# EAGLE board 6-axis-copter (EAGLE 7.0.0)
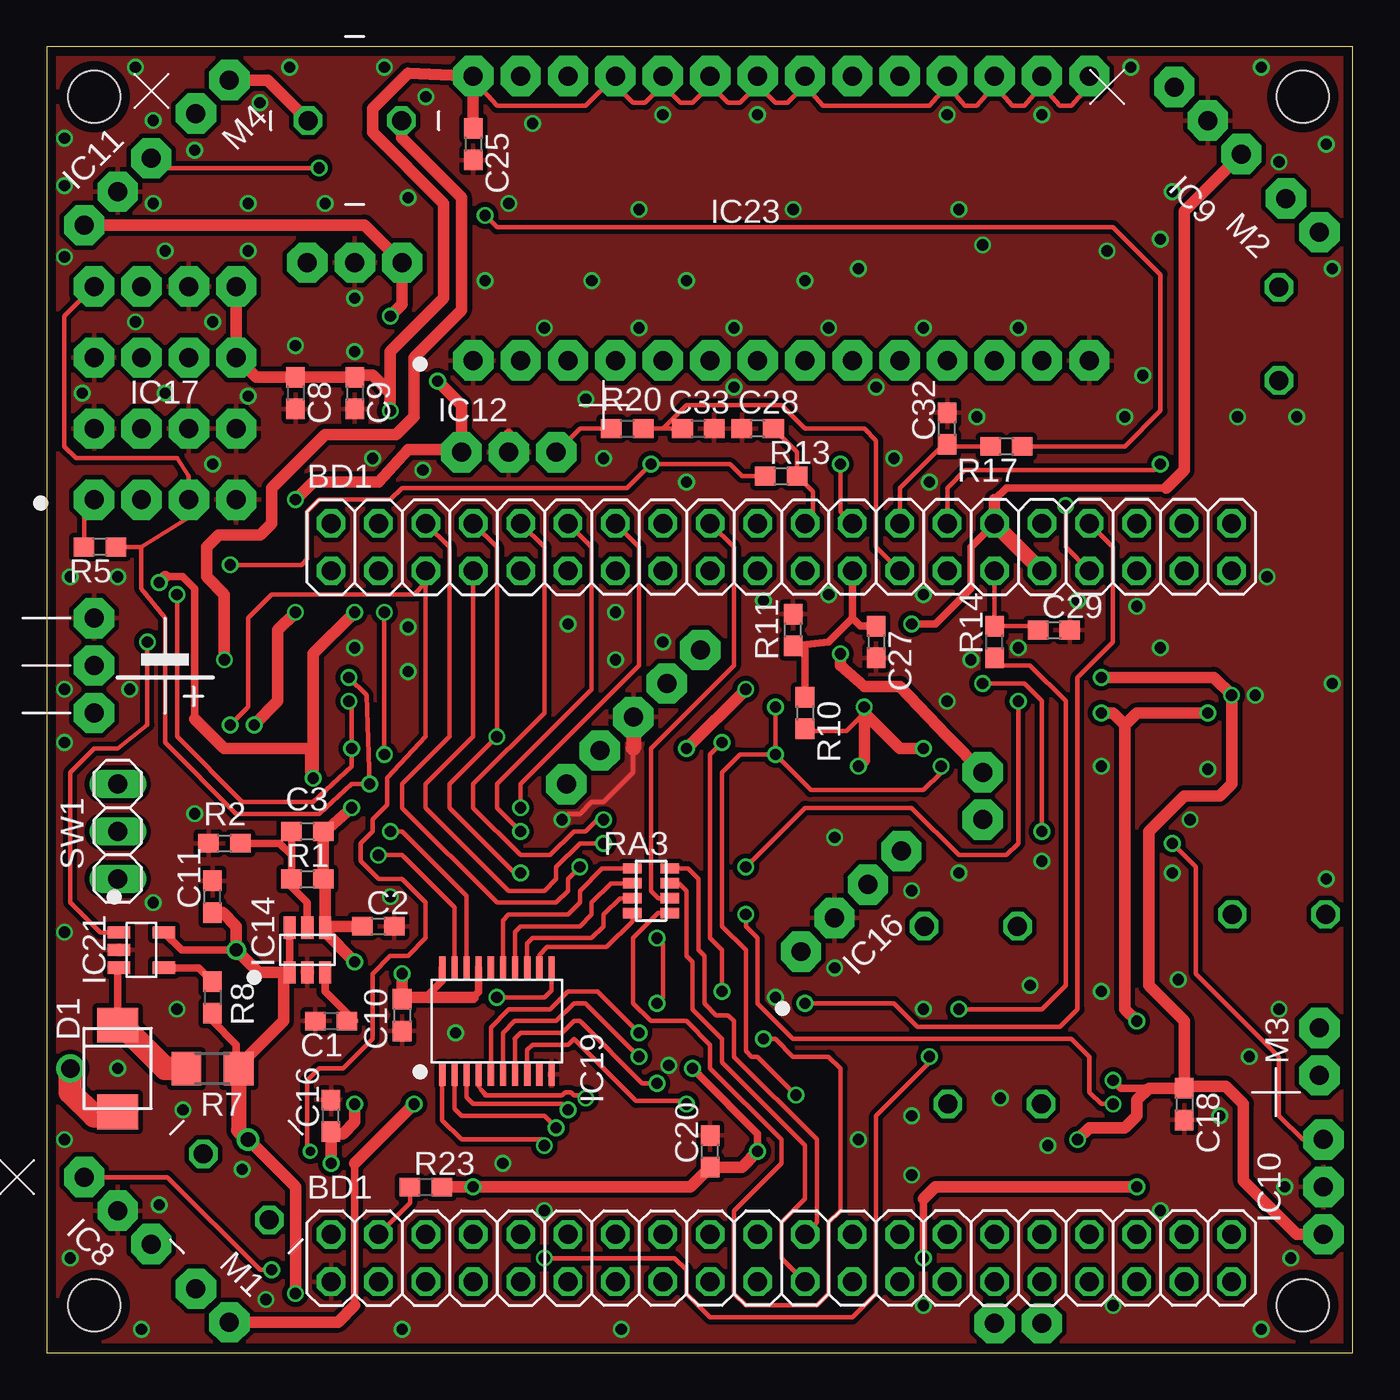
[diagram p0: board, top side]
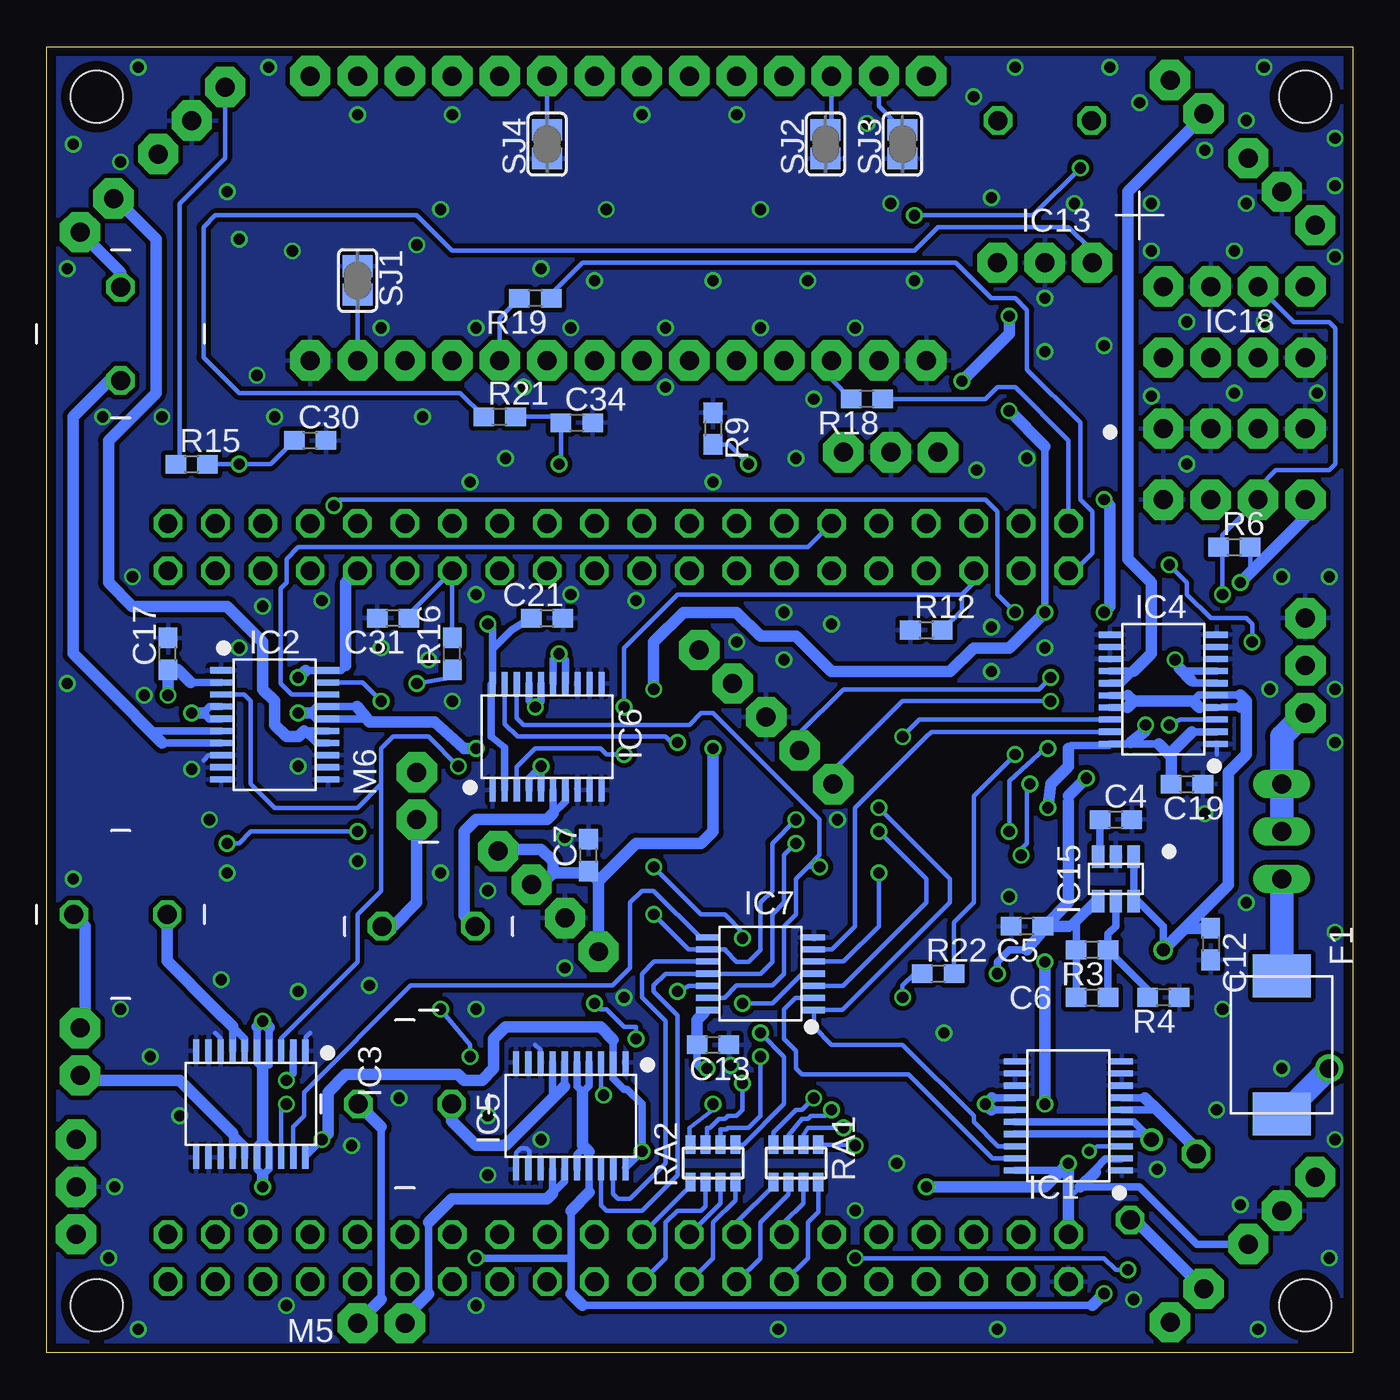
[diagram p1: board, bottom side, seen from below]

Size 70 x 70 mm. Coordinates in mm from the lower left corner, seen from the top.
Outline: 0,0 70,0 70,70 0,70 0,0
Copper layers (1*16): Top 0.035mm / dielectric 1.53mm / Bottom 0.035mm
Design rules "pban_5mil-l2": minimum track width 5mil, minimum drill 0.3mm, track to track 5mil, track to pad 0.229mm, pad to pad 5mil, via to via 5mil, smd to smd 5mil, copper to edge 0.5mm, drill to drill 0.5mm, minimum pad ring 0.15mm, minimum via ring 0.15mm, stop-mask expansion 4mil, vias tented up to drill 0.35mm, thermal gap 10mil
Holes 2.8 mm at 2.54,67.31 2.54,2.54 67.31,2.54 67.31,67.31
bRestrict: 19 lines

## Footprints (pad centres in the part's own frame; a part is rotated, then mirrored left to right if it is on the bottom)
LIPO2CEL = drill 1.016 pad 2.159 octagon: + 2.54,0; +- 0,0; - -2.54,0
H8-PRO-BOARD = drill 1.016 octagon: 1 24.13,20.32; 2 24.13,17.78; 3 21.59,20.32; 4 21.59,17.78; 5 19.05,20.32; 6 19.05,17.78; 7 16.51,20.32; 8 16.51,17.78; 9 13.97,20.32; 10 13.97,17.78; 11 11.43,20.32; 12 11.43,17.78; 13 8.89,20.32; 14 8.89,17.78; 15 6.35,20.32; 16 6.35,17.78; 17 3.81,20.32; 18 3.81,17.78; 19 1.27,20.32; 20 1.27,17.78; 21 -1.27,20.32; 22 -1.27,17.78; 23 -3.81,20.32; 24 -3.81,17.78; 25 -6.35,20.32; 26 -6.35,17.78; 27 -8.89,20.32; 28 -8.89,17.78; 29 -11.43,20.32; 30 -11.43,17.78; 31 -13.97,20.32; 32 -13.97,17.78; 33 -16.51,20.32; 34 -16.51,17.78; 35 -19.05,20.32; 36 -19.05,17.78; 37 -21.59,20.32; 38 -21.59,17.78; 39 -24.13,20.32; 40 -24.13,17.78; 41 -24.13,-20.32; 42 -24.13,-17.78; 43 -21.59,-20.32; 44 -21.59,-17.78; 45 -19.05,-20.32; 46 -19.05,-17.78; 47 -16.51,-20.32; 48 -16.51,-17.78; 49 -13.97,-20.32; 50 -13.97,-17.78; 51 -11.43,-20.32; 52 -11.43,-17.78; 53 -8.89,-20.32; 54 -8.89,-17.78; 55 -6.35,-20.32; 56 -6.35,-17.78; 57 -3.81,-20.32; 58 -3.81,-17.78; 59 -1.27,-20.32; 60 -1.27,-17.78; 61 1.27,-20.32; 62 1.27,-17.78; 63 3.81,-20.32; 64 3.81,-17.78; 65 6.35,-20.32; 66 6.35,-17.78; 67 8.89,-20.32; 68 8.89,-17.78; 69 11.43,-20.32; 70 11.43,-17.78; 71 13.97,-20.32; 72 13.97,-17.78; 73 16.51,-20.32; 74 16.51,-17.78; 75 19.05,-20.32; 76 19.05,-17.78; 77 21.59,-20.32; 78 21.59,-17.78; 79 24.13,-20.32; 80 24.13,-17.78
C1608 = smd 1.1 x 1: 1 -0.85,0; 2 0.85,0
SMBF = smd 1.85 x 2.2: 1 2.325,0; 2 -2.325,0
MF-SM300-2 = smd 2.3 x 3.1: 1 -3.7,0; 2 3.7,0
SSOP20-0.65 = smd 0.33 x 1.2: 1 -2.925,-2.86; 2 -2.275,-2.86; 3 -1.625,-2.86; 4 -0.975,-2.86; 5 -0.325,-2.86; 6 0.325,-2.86; 7 0.975,-2.86; 8 1.625,-2.86; 9 2.275,-2.86; 10 2.925,-2.86; 11 2.925,2.86; 12 2.275,2.86; 13 1.625,2.86; 14 0.975,2.86; 15 0.325,2.86; 16 -0.325,2.86; 17 -0.975,2.86; 18 -1.625,2.86; 19 -2.275,2.86; 20 -2.925,2.86
TSSOP14-0.65 = smd 0.33 x 1.2: 1 -1.95,-2.86; 2 -1.3,-2.86; 3 -0.65,-2.86; 4 0,-2.86; 5 0.65,-2.86; 6 1.3,-2.86; 7 1.95,-2.86; 8 1.95,2.86; 9 1.3,2.86; 10 0.65,2.86; 11 0,2.86; 12 -0.65,2.86; 13 -1.3,2.86; 14 -1.95,2.86
DUMMY-GP2Y0A21YK = drill 1.016 pad 2.159 octagon: 1 2.54,0; 2 0,0; 3 -2.54,0
SOT23-6-0.95 = smd 0.65 x 1.2: 1 -0.95,-1.2; 2 0,-1.2; 3 0.95,-1.2; 4 0.95,1.2; 5 0,1.2; 6 -0.95,1.2
DIP9-2.54 = drill 1.016 pad 2.159 octagon: 1 -2.54,-7.62; 2 0,-7.62; 3 2.54,-7.62; 4 5.08,-7.62; 5 5.08,7.62; 6 2.54,7.62; 7 0,7.62; 8 -2.54,7.62; 9 -5.08,7.62
DIP8-2.54 = drill 1.016 pad 2.159 octagon: 1 -3.81,-3.81; 2 -1.27,-3.81; 3 1.27,-3.81; 4 3.81,-3.81; 5 3.81,3.81; 6 1.27,3.81; 7 -1.27,3.81; 8 -3.81,3.81
TSOT23-5-0.95 = smd 0.65 x 1.2: 1 -0.95,-1.2; 2 0,-1.2; 3 0.95,-1.2; 4 0.95,1.2; 5 -0.95,1.2
DIP28-2.54 = drill 1.016 pad 2.159 octagon: 1 -16.51,-7.62; 2 -13.97,-7.62; 3 -11.43,-7.62; 4 -8.89,-7.62; 5 -6.35,-7.62; 6 -3.81,-7.62; 7 -1.27,-7.62; 8 1.27,-7.62; 9 3.81,-7.62; 10 6.35,-7.62; 11 8.89,-7.62; 12 11.43,-7.62; 13 13.97,-7.62; 14 16.51,-7.62; 15 16.51,7.62; 16 13.97,7.62; 17 11.43,7.62; 18 8.89,7.62; 19 6.35,7.62; 20 3.81,7.62; 21 1.27,7.62; 22 -1.27,7.62; 23 -3.81,7.62; 24 -6.35,7.62; 25 -8.89,7.62; 26 -11.43,7.62; 27 -13.97,7.62; 28 -16.51,7.62
LHL08 = drill 1.016 octagon: 1 -2.5,0; 2 2.5,0
DUMMY-MK07 = drill 1.016 pad 2.159 octagon: + 1.27,0; - -1.27,0
R3216 = smd 1.6 x 1.8: 1 -1.4,0; 2 1.4,0
BCN164AB = smd 0.55 x 1: 1 -1.2,-1; 2 -0.4,-1; 3 0.4,-1; 4 1.2,-1; 5 1.2,1; 6 0.4,1; 7 -0.4,1; 8 -1.2,1
SJ = smd 1.168 x 1.6: 1 -0.762,0; 2 0.762,0
SS12D01G4 = drill 1.016 long: 1 -2.54,0; 2 0,0; 3 2.54,0

## Placement (x,y rotation side)
B1  [LIPO2CEL]  2.54,36.83 270 top
BD1  [H8-PRO-BOARD]  39.37,24.13 0 top
C1  0.01u  [C1608]  15.24,17.78 180 top
C2  1u  [C1608]  17.78,22.86 0 top
C3  100p  [C1608]  13.97,27.94 180 top
C4  0.01u  [C1608]  12.7,28.57 0 bottom
C5  1u  [C1608]  17.46,22.86 180 bottom
C6  100p  [C1608]  13.97,19.05 0 bottom
C7  0.1u  [C1608]  40.96,26.67 90 bottom
C8  0.1u  [C1608]  13.34,51.44 270 top
C9  0.1u  [C1608]  16.51,51.44 270 top
C10  0.1u  [C1608]  19.05,18.1 270 top
C11  1u  [C1608]  8.89,24.45 90 top
C12  1u  [C1608]  7.62,21.91 270 bottom
C13  0.1u  [C1608]  34.29,16.51 0 bottom
C16  0.1u  [C1608]  15.24,12.7 90 top
C17  0.1u  [C1608]  63.5,37.47 90 bottom
C18  0.1u  [C1608]  60.96,13.34 270 top
C19  0.1u  [C1608]  8.89,30.48 0 bottom
C20  0.1u  [C1608]  35.56,10.79 90 top
C21  0.1u  [C1608]  43.18,39.37 0 bottom
C25  0.1u  [C1608]  22.86,64.77 270 top
C27  0.1u  [C1608]  44.45,38.1 270 top
C28  0.1u  [C1608]  38.1,49.53 180 top
C29  0.1u  [C1608]  53.98,38.73 0 top
C30  0.1u  [C1608]  55.88,48.9 0 bottom
C31  0.1u  [C1608]  51.44,39.37 180 bottom
C32  0.1u  [C1608]  48.26,49.53 90 top
C33  0.1u  [C1608]  34.92,49.53 0 top
C34  0.1u  [C1608]  41.59,49.85 0 bottom
D1  [SMBF]  3.81,15.24 90 top
F1  [MF-SM300-2]  3.81,16.51 270 bottom
IC1  [SSOP20-0.65]  15.24,12.7 90 bottom
IC2  [SSOP20-0.65]  57.78,33.66 270 bottom
IC3  [SSOP20-0.65]  59.05,13.34 180 bottom
IC4  [SSOP20-0.65]  10.16,35.56 90 bottom
IC5  [SSOP20-0.65]  41.91,12.7 180 bottom
IC6  [SSOP20-0.65]  43.18,33.02 0 bottom
IC7  [TSSOP14-0.65]  31.75,20.32 90 bottom
IC8  [DUMMY-GP2Y0A21YK]  3.81,7.62 135 top
IC9  [DUMMY-GP2Y0A21YK]  62.23,66.04 135 top
IC10  [DUMMY-GP2Y0A21YK]  68.42,8.89 90 top
IC11  [DUMMY-GP2Y0A21YK]  3.81,62.23 45 top
IC12  [DUMMY-GP2Y0A21YK]  24.77,48.26 0 top
IC13  [DUMMY-GP2Y0A21YK]  16.51,58.42 0 bottom
IC14  [SOT23-6-0.95]  13.97,21.59 0 top
IC15  [SOT23-6-0.95]  12.7,25.4 180 bottom
IC16  [DIP9-2.54]  36.83,28.68 45 top
IC17  [DIP8-2.54]  6.35,49.53 0 top
IC18  [DIP8-2.54]  6.35,53.34 0 bottom
IC19  [SSOP20-0.65]  24.13,17.78 0 top
IC21  [TSOT23-5-0.95]  5.08,21.59 270 top
IC23  [DIP28-2.54]  39.37,60.8 0 top
L1  LHL08NB101K  [LHL08]  10.16,8.89 315 top
L2  LHL08NB101K  [LHL08]  66.04,54.61 90 bottom
L3  LHL08NB101K  [LHL08]  66.04,23.5 180 bottom
L4  LHL08NB101K  [LHL08]  16.51,66.04 180 top
L5  LHL08NB101K  [LHL08]  50.8,13.34 180 bottom
L6  LHL08NB101K  [LHL08]  49.53,22.86 180 bottom
M1  [DUMMY-MK07]  8.89,2.54 135 top
M2  [DUMMY-MK07]  67.31,60.96 315 top
M3  [DUMMY-MK07]  68.21,16.14 90 top
M4  [DUMMY-MK07]  8.89,67.31 45 top
M5  [DUMMY-MK07]  52.07,1.59 180 bottom
M6  [DUMMY-MK07]  50.16,29.84 270 bottom
R1  3.9kJ  [C1608]  13.97,25.4 0 top
R2  1.5kJ  [C1608]  9.53,27.3 0 top
R3  6.2kJ  [C1608]  13.97,21.59 180 bottom
R4  3.3kJ  [C1608]  10.16,19.05 180 bottom
R5  4.7kJ  [C1608]  2.86,43.18 180 top
R6  4.7kJ  [C1608]  6.35,43.18 0 bottom
R7  0.02D(3216)  [R3216]  8.89,15.24 0 top
R8  200J  [C1608]  8.89,19.05 270 top
R9  10kJ  [C1608]  34.29,49.53 270 bottom
R10  10kJ  [C1608]  40.64,34.29 270 top
R11  10kJ  [C1608]  40.01,38.73 90 top
R12  4.7kJ  [C1608]  22.86,38.73 0 bottom
R13  1.5kJ  [C1608]  39.37,46.99 0 top
R14  1.5kJ  [C1608]  50.8,38.1 90 top
R15  1.5kJ  [C1608]  62.23,47.62 0 bottom
R16  1.5kJ  [C1608]  48.26,37.47 90 bottom
R17  1.5kJ  [C1608]  51.44,48.58 180 top
R18  4.7kJ  [C1608]  26.04,51.12 180 bottom
R19  4.7kJ  [C1608]  43.81,56.52 180 bottom
R20  1.5kJ  [C1608]  31.11,49.53 0 top
R21  1.5kJ  [C1608]  45.72,50.16 0 bottom
R22  1.5kJ  [C1608]  22.23,20.32 0 bottom
R23  4.7kJ  [C1608]  20.32,8.89 0 top
RA1  1kJx4  [BCN164AB]  29.84,10.16 180 bottom
RA2  1kJx4  [BCN164AB]  34.29,10.16 180 bottom
RA3  1kJx4  [BCN164AB]  32.38,24.77 270 top
SJ1  [SJ]  53.34,57.47 270 bottom
SJ2  [SJ]  28.26,64.77 90 bottom
SJ3  [SJ]  24.13,64.77 90 bottom
SJ4  [SJ]  43.18,64.77 90 bottom
SW1  SS12D01G4  [SS12D01G4]  3.81,27.94 270 top

## Library data of the parts
B1 = symbol
BD1 SJ1-SJ4 = connector
C1-C13 C16-C21 C25 C27-C34 D1 F1 L1-L6 M1-M6 R1-R23 RA1-RA3 = passive
IC1-IC19 IC21 IC23 = IC
SW1 = SW

## Nets
3.6V: C5.1 C6.1 C7.1 C8.1 C9.1 C10.1 C25.1 IC15.4 IC16.1 IC16.3 IC16.4 IC17.1 IC17.5 IC18.8 IC19.17 IC19.20 IC23.15 IC23.16 IC23.17 IC23.18 IC23.21 IC23.22 IC23.23 IC23.24 IC23.25 IC23.28 R3.2 R5.2 R6.2
4.5V: BD1.10 BD1.11 BD1.42 C2.1 C3.1 C13.1 C16.1 C17.1 C18.1 C19.1 C20.1 C21.1 IC1.2 IC1.20 IC2.2 IC2.20 IC3.2 IC3.20 IC4.2 IC4.20 IC5.2 IC5.20 IC6.2 IC6.20 IC7.14 IC8.3 IC9.3 IC10.3 IC11.3 IC12.3 IC13.3 IC14.4 R1.2 R23.2
!CS1: BD1.23 RA3.6
!HWR: BD1.8 R22.2
!IRQ5: BD1.44 R23.1
!RD: BD1.7 RA3.5
A0: BD1.61 RA3.7
A1: BD1.62 RA3.8
BAT: C11.1 C12.1 IC1.4 IC1.5 IC1.16 IC1.17 IC2.4 IC2.5 IC2.16 IC2.17 IC3.4 IC3.5 IC3.16 IC3.17 IC4.4 IC4.5 IC4.16 IC4.17 IC5.4 IC5.5 IC5.16 IC5.17 IC6.4 IC6.5 IC6.16 IC6.17 IC14.1 IC14.6 IC15.1 IC15.6 IC21.5 R7.2 R8.2 R10.2
BAT-I: BD1.19 C28.1 R13.2
BAT-V: BD1.18 C27.1 R10.1 R11.1
D8: BD1.53 RA1.8
D9: BD1.54 RA1.7
D10: BD1.55 RA1.6
D11: BD1.56 RA1.5
D12: BD1.57 RA2.8
D13: BD1.58 RA2.7
D14: BD1.59 RA2.6
D15: BD1.60 RA2.5
DISTANCE-1: BD1.12 C29.1 R14.2
DISTANCE-2: BD1.13 C30.1 R15.2
DISTANCE-3: BD1.14 C31.1 R16.2
DISTANCE-4: BD1.15 C32.1 R17.2
DISTANCE-5: BD1.16 C33.1 R20.2
DISTANCE-6: BD1.17 C34.1 R21.2
GND: B1.- BD1.41 C1.2 C2.2 C4.2 C5.2 C7.2 C8.2 C9.2 C10.2 C11.2 C12.2 C13.2 C16.2 C17.2 C18.2 C19.2 C20.2 C21.2 C25.2 C27.2 C28.2 C29.2 C30.2 C31.2 C32.2 C33.2 C34.2 IC1.1 IC1.8 IC1.9 IC1.10 IC1.11 IC1.12 IC1.13 IC2.1 IC2.8 IC2.9 IC2.10 IC2.11 IC2.12 IC2.13 IC3.1 IC3.8 IC3.9 IC3.10 IC3.11 IC3.12 IC3.13 IC4.1 IC4.8 IC4.9 IC4.10 IC4.11 IC4.12 IC4.13 IC5.1 IC5.8 IC5.9 IC5.10 IC5.11 IC5.12 IC5.13 IC6.1 IC6.8 IC6.9 IC6.10 IC6.11 IC6.12 IC6.13 IC7.7 IC8.2 IC9.2 IC10.2 IC11.2 IC12.2 IC13.2 IC14.2 IC15.2 IC16.2 IC16.7 IC17.4 IC17.8 IC18.1 IC18.2 IC18.4 IC18.7 IC19.10 IC21.2 IC23.1 IC23.14 R2.1 R4.1 R9.1 R11.2 R12.1 SJ1.1 SJ2.1 SJ3.1 SJ4.1
MOTER-PWM-N-1: IC1.19 IC7.2
MOTER-PWM-N-2: IC2.19 IC7.4
MOTER-PWM-N-3: IC3.19 IC7.8
MOTER-PWM-N-4: IC4.19 IC7.6
MOTER-PWM-N-5: IC5.19 IC7.10
MOTER-PWM-N-6: IC6.19 IC7.12
MOTER-PWM-P-1: BD1.27 IC1.18 IC7.1
MOTER-PWM-P-2: BD1.29 IC2.18 IC7.3
MOTER-PWM-P-3: BD1.31 IC3.18 IC7.9
MOTER-PWM-P-4: BD1.33 IC4.18 IC7.5
MOTER-PWM-P-5: BD1.34 IC5.18 IC7.11
MOTER-PWM-P-6: BD1.35 IC6.18 IC7.13
N$1: IC1.6 IC1.7 L1.1
N$2: IC1.14 IC1.15 M1.-
N$3: IC2.6 IC2.7 L2.1
N$4: IC2.14 IC2.15 M2.-
N$5: IC3.6 IC3.7 L3.1
N$6: IC3.14 IC3.15 M3.-
N$7: IC4.6 IC4.7 L4.1
N$8: IC4.14 IC4.15 M4.-
N$9: IC5.6 IC5.7 L5.1
N$10: IC5.14 IC5.15 M5.-
N$11: IC6.6 IC6.7 L6.1
N$12: IC6.14 IC6.15 M6.-
N$13: L1.2 M1.+
N$14: C1.1 IC14.3
N$15: C3.2 IC14.5 R1.1 R2.2
N$16: D1.1 IC21.3 R7.1
N$17: C4.1 IC15.3
N$18: C6.2 IC15.5 R3.1 R4.2
N$19: IC16.8 IC17.3 IC18.5 IC19.19 R5.1
N$20: IC16.9 IC17.2 IC18.6 IC19.18 R6.1
N$21: IC21.4 R8.1
N$22: D1.2 F1.2
N$23: B1.+ SW1.1 SW1.2
N$24: IC23.3 R18.2
N$25: L2.2 M2.+
N$26: L3.2 M3.+
N$27: L4.2 M4.+
N$28: IC23.27 SJ3.2
N$29: IC23.26 SJ2.2
N$30: IC23.13 SJ1.2
N$31: IC23.20 SJ4.2
N$32: IC21.1 R9.2 R13.1
N$33: IC23.10 R19.2
N$34: IC9.1 R15.1
N$35: L5.2 M5.+
N$36: IC8.1 R14.1
N$37: IC10.1 R16.1
N$38: L6.2 M6.+
N$39: F1.1 SW1.3
N$44: IC12.1 R20.1
N$45: IC11.1 R17.1
N$46: IC13.1 R21.1
N$47: IC19.1 RA1.1
N$48: IC19.2 RA1.2
N$49: IC19.3 RA1.3
N$50: IC19.4 RA1.4
N$51: IC19.5 RA2.1
N$52: IC19.6 RA2.2
N$53: IC19.7 RA2.3
N$54: IC19.8 RA2.4
N$55: IC19.15 RA3.1
N$56: IC19.14 RA3.2
N$57: IC19.13 RA3.3
N$58: IC19.12 RA3.4
N$59: IC19.11 R22.1
PWM-STBY: BD1.36 IC1.3 IC2.3 IC3.3 IC4.3 IC5.3 IC6.3 R12.2
ZIGBEE-RX: BD1.39 R18.1
ZIGBEE-TX: BD1.40 R19.1

## Tracks (layer width: path | path; a pad name or v marks a point on that pad's centre or on a via)
3.6V  (via drill 0.6)
  Top 0.254: 19.15,18.95 C10.1 19.15,19.05 | 16.61,52.39 C9.1 | R5.2 2.01,45.19 IC17.1 | IC23.28 22.86,68.26 24.13,66.83 28.89,66.83 IC23.25 30.48,67.94 31.43,66.99 32.07,66.99 33.02,67.94 | IC23.24 33.02,67.94 | 33.02,67.94 33.97,66.99 34.61,66.99 35.56,67.94 | IC23.23 35.56,67.94 | 35.56,67.94 36.51,66.99 37.15,66.99 38.1,67.94 | IC23.22 38.1,67.94 | 38.1,67.94 39.05,66.99 39.69,66.99 40.64,67.94 | IC23.21 40.64,67.94 | 40.64,67.94 41.59,66.83 47.31,66.83 48.26,67.94 | IC23.18 48.26,67.94 | 48.26,67.94 49.21,66.83 49.85,66.83 50.8,67.94 | IC23.17 50.8,67.94 | 50.8,67.94 51.75,66.83 52.39,66.83 53.34,67.94 | IC23.16 53.34,67.94 | 53.34,67.94 54.29,66.83 54.93,66.83 55.88,67.94 IC23.15 | 13.97,32.38 13.97,31.11 v14.29,30.8
  Top 0.406: IC19.17 23.16,19.34 22.86,19.05 | IC19.20 21.2,19.93 20.32,19.05 | 6.35,41.59 7.3,41.59 7.94,40.96 7.94,33.97
  Top 0.61: 22.86,19.05 20.32,19.05 19.15,19.05 | C25.1 IC23.28 19.37,68.58 17.46,66.67 17.46,65.41 21.27,61.59 21.27,56.52 18.41,53.66 v18.41,50.48 18.41,51.44 17.46,52.39 16.61,52.39 | C9.1 C8.1 11.21,52.28 IC17.5 IC18.8 | v6.03,41.27 6.35,41.59 | 7.94,33.97 9.53,32.38 13.97,32.38 | C10.1 v19.05,20.32 | v14.29,30.8 14.29,37.47 v16.51,39.69 | v34.29,32.38 v37.47,35.56
  Bottom 0.254: 16.51,22.86 C5.1 16.51,22.76 | R6.2 5.5,41.81 v6.03,41.27 | 15.24,29.53 15.24,29.84 | 41.06,25.72 C7.1 | IC16.1 40.42,25.3
  Bottom 0.406: C6.1 R3.2 14.82,23.03 IC15.4 13.9,24.2 15.24,22.86 | v19.05,20.32 19.05,20.95 18.41,21.59 17.46,21.59 | 45.71,26.99 IC16.4 | v16.51,39.69 16.51,48.58
  Bottom 0.61: 15.24,22.86 C5.1 | 16.51,22.86 15.24,24.13 15.24,29.53 | 16.51,48.58 v18.41,50.48 | IC17.1 2.54,44.77 v6.03,41.27 | 17.46,21.59 16.51,22.76 | 15.24,29.84 v14.29,30.8 | IC16.3 43.49,25.09 42.86,25.72 | 42.86,25.72 42.86,26.35 43.5,26.99 45.71,26.99 | IC16.1 40.42,25.29 C7.1 | 42.86,25.72 41.06,25.72 | 40.42,25.3 38.42,27.3 34.92,27.3 34.29,27.94 v34.29,32.38 | v37.47,35.56 37.47,38.1 35.88,39.69 33.02,39.69 31.75,38.42 29.84,38.42 27.94,36.51 21.59,36.51 20.32,37.78 18.41,37.78 v16.51,39.69
4.5V  (via drill 0.6)
  Top 0.254: 14.92,22.55 IC14.4 15.01,22.79 15.08,22.86 | 15.34,11.75 C16.1 | 61.06,14.29 C18.1 | C3.1 14.92,27.94 | 34.92,14.92 v34.61,15.24 | IC12.3 22.07,48.26 21.91,48.42
  Top 0.406: 14.92,25.3 R1.2 | 16.86,22.79 C2.1 | 59.05,14.19 57.57,14.19 v57.15,14.61 | 50.8,45.72 51.44,46.35 60.01,46.35 | v46.35,39.05 47.62,39.05 49.53,40.96 49.53,43.18 BD1.11 | 34.92,14.92 38.1,11.75 v38.1,10.79
  Top 0.61: IC14.4 14.92,25.3 | C3.1 R1.2 | C16.1 v15.24,10.16 | v38.1,10.79 37.25,9.95 C20.1 34.51,8.89 v22.86,8.89 R23.2 | v55.24,11.43 55.88,12.06 57.78,12.06 58.42,12.7 58.42,13.55 59.05,14.19 C18.1 60.96,17.78 59.05,19.68 59.05,27.94 60.96,29.84 62.87,29.84 63.5,30.48 v63.5,35.24 62.55,36.2 v56.52,36.2 | 14.92,22.55 v16.51,20.95 | v16.51,13.34 16.51,12.38 15.88,11.75 15.34,11.75 | IC10.3 66.99,6.35 64.14,9.21 64.14,13.34 63.18,14.29 61.06,14.29 | BD1.11 50.8,45.72 | 60.01,46.35 60.96,47.31 60.96,61.18 IC9.3 | IC11.3 17.04,60.43 IC13.3 19.05,56.2 v18.41,55.56 | IC12.3 22.23,50.8 v20.95,52.07 | 14.92,27.94 v16.35,29.21 | v11.11,33.66 12.38,34.92 12.38,38.73 v13.34,39.69 | v13.34,45.72 14.29,46.67 17.78,46.67 19.37,48.42 21.91,48.42 | 15.08,22.86 C2.1
  Top 0.813: BD1.11 BD1.10
  Bottom 0.254: 12.4,10.4 IC1.2 | 15.62,9.78 v15.24,10.16 | 14.61,8.89 15.24,8.26 | IC5.20 38.98,9.91 | IC3.20 56.13,10.54 | C19.1 9.74,31.96 | C17.1 62.97,36.62 | 62.28,35.93 62.23,35.88 | 13.09,32.54 IC4.20 | 15.08,32.54 11.91,32.7 | 53.98,36.83 54.29,36.51 56.2,36.51 v56.52,36.2 | 46.2,35.81 IC6.20 | 13.81,9.84 13.81,9.68 | 39.63,14.87 39.63,14.71 | 39.05,14.13 38.89,14.13 | IC7.14 34.65,18.37 34.77,18.26 34.77,18.21
  Bottom 0.406: IC1.20 15.62,9.78 | 12.4,10.4 13.25,10.4 13.81,9.84 | IC8.3 8.36,5.82 11.43,8.89 14.61,8.89 | C21.1 45.09,38.73 46.1,37.72 | IC6.20 46.1,37.72 | 38.98,9.91 v38.1,10.79 38.1,13.34 38.89,14.13 | 39.63,14.87 IC5.2 39.63,16.77 | IC3.2 56.78,14.97 v57.15,14.61 | 56.13,10.54 v55.24,11.43 | IC4.20 10.41,32.63 | IC4.2 8.62,33.28 | 56.13,36.58 IC2.20 54.23,36.58 53.98,36.83 | IC2.2 62.28,35.93 | 15.24,32.38 15.08,32.54 13.09,32.54 | 46.2,35.81 46.2,33.02 45.45,32.44 IC6.2 | 46.1,37.72 46.1,38.8 v46.35,39.05 | C13.1 35.14,15.46 34.92,15.24 v34.61,15.24 | 39.63,14.71 39.05,14.13
  Bottom 0.61: BD1.42 15.24,8.26 v15.24,10.16 16.51,8.89 v22.86,8.89 | C13.1 35.14,17.84 34.77,18.21 | 9.74,31.96 10.41,32.63 | C19.1 9.74,32.17 8.62,33.28 | v16.51,20.95 v16.51,13.34 | 39.63,16.77 40.32,17.46 45.4,17.46 46.04,16.83 46.04,15.24 46.67,14.61 47.62,14.61 47.94,14.92 53.98,14.92 54.93,13.97 54.93,11.75 v55.24,11.43 | 56.13,36.58 v56.52,36.2 | v63.5,35.24 C17.1 | 62.97,36.62 62.28,35.93 | 53.98,36.83 53.98,41.27 BD1.10 | v20.95,52.07 18.41,54.61 v18.41,55.56 | v16.35,29.21 16.19,30.48 15.24,31.43 15.24,32.38 | 11.91,32.7 11.11,33.34 v11.11,33.66 | v13.34,45.72 13.02,45.4 13.02,40.01 v13.34,39.69 | 13.81,9.68 14.61,8.89
!CS1
  Top 0.254: BD1.23 36.83,43.18 36.83,36.83 32.38,32.38 32.38,24.77 32.78,24.36 RA3.6
!HWR  (via drill 0.6)
  Top 0.254: v18.1,32.07 v18.1,39.69 | v54.61,45.4 54.61,43.18 BD1.8
  Bottom 0.254: R22.2 21.38,23.07 20.32,24.13 20.32,29.84 v18.1,32.07 | v18.1,39.69 19.05,40.64 19.05,45.09 19.68,45.72 54.29,45.72 v54.61,45.4
!IRQ5
  Top 0.254: R23.1 19.47,8.04 BD1.44
!RD  (via drill 0.6)
  Top 0.254: RA3.5 32.77,23.57 31.43,22.23 31.43,18.73 32.38,17.78 34.29,17.78 35.56,16.51 35.56,15.24 39.37,11.43 39.37,10.16 36.83,7.62 36.83,3.17 37.47,2.54 41.27,2.54 41.91,3.17 41.91,6.99 42.55,7.62 42.55,15.24 41.91,15.88 40.01,15.88 39.05,16.83 v38.42,16.83 | BD1.7 57.15,43.18 57.15,38.1 55.24,36.2 55.24,18.41 54.29,17.46 46.67,17.46 45.4,18.73 v40.64,18.73
  Bottom 0.254: v38.42,16.83 38.42,17.46 39.05,17.46 40.01,18.41 40.32,18.41 v40.64,18.73
A0
  Top 0.254: BD1.61 39.37,5.08 39.37,6.99 40.64,8.26 40.64,11.11 36.2,15.56 36.2,16.83 34.61,18.41 34.61,20.95 34.29,21.27 34.29,24.77 33.89,25.16 RA3.7
A1
  Top 0.254: BD1.62 41.27,6.99 41.27,11.43 36.83,15.88 36.83,17.78 36.51,18.1 35.88,18.1 35.24,18.73 35.24,21.27 34.92,21.59 34.92,25.4 34.36,25.96 RA3.8
BAT  (via drill 0.6, 0.7, 0.8)
  Top 0.254: v43.81,34.61 43.81,34.29 42.86,33.34 40.74,33.34 R10.2
  Top 0.406: R8.2 8.89,17.78 10.16,16.51 10.16,15.37 R7.2 10.29,15.37 | v10.16,21.59 7.23,21.59 IC21.5 | IC14.6 IC14.1 | 46.99,8.26 v46.99,5.08
  Top 0.61: 10.29,15.37 12.7,17.78 12.7,20.07 IC14.1 11.36,20.39 v10.16,21.59 10.16,22.86 9.42,23.6 C11.1 | v13.34,3.17 13.34,8.89 v10.79,11.43 | v58.42,8.89 47.62,8.89 46.99,8.26 | v62.23,34.29 58.42,34.29 57.78,33.66 | v56.52,34.29 57.15,34.29 57.78,33.66 | v58.42,17.78 57.78,18.41 57.78,33.66 | v43.81,34.61 43.81,31.75 v43.5,31.43 | 43.81,34.29 45.72,32.38 v46.99,32.38
  Top 0.813: R7.2 10.29,11.94 v10.79,11.43
  Bottom 0.254: 11.09,11.72 v10.79,11.43 | v43.51,31.43 v43.5,31.43 | 55.24,33.97 51.44,33.81 | 7.31,35.24 IC4.5 | 52.86,33.97 52.7,33.81
  Bottom 0.406: v10.16,21.59 10.16,22.86 11.5,24.2 IC15.6 IC15.1 | v10.79,11.43 11.74,12.38 IC1.5 IC1.16 | 11.09,11.72 IC1.4 IC1.17 | IC5.4 40.94,14.31 41.27,13.97 41.59,14.28 IC5.5 | 40.94,8.6 IC5.17 40.94,10.77 | 41.91,7.62 41.91,5.08 | 41.91,5.08 41.91,3.17 | 41.27,2.54 13.97,2.54 | 58.42,15.24 58.73,15.55 IC3.5 58.73,17.47 | v46.99,5.08 41.91,5.08 | IC2.16 55.57,33.98 55.88,34.29 55.54,34.63 IC2.17 53.36,34.63 | IC2.5 61.28,33.98 61.59,34.29 61.26,34.63 IC2.4 | 58.08,15.42 IC3.4 58.08,17.44 | IC6.16 43.51,34.92 v43.81,34.61 44.16,34.95 IC6.17 | IC6.5 v43.51,31.43 | IC6.4 44.16,30.77 v43.5,31.43 | IC4.16 12.06,35.23 | IC4.17 12.09,34.59 | 8.57,34.92 8.26,35.24 7.31,35.24 6.03,35.24 | IC4.4 8.23,34.59 | 6.03,34.61 6.99,34.61 | 55.24,33.97 52.86,33.97 | IC5.16 41.59,10.64 41.2,11.03 | IC3.17 58.08,11.09 58.42,11.43 58.73,11.12 IC3.16 58.73,9.84 58.42,9.53 58.08,9.87 IC3.17
  Bottom 0.61: C12.1 8.99,22.76 | 8.99,22.76 v10.16,21.59 | 40.94,8.6 41.91,7.62 | 41.91,3.17 41.27,2.54 | 13.97,2.54 v13.34,3.17 | 58.42,11.43 58.42,15.24 | 58.42,9.53 v58.42,8.89 | 55.88,34.29 v56.52,34.29 | 61.59,34.29 v62.23,34.29 | 58.08,17.44 v58.42,17.78 58.73,17.47 | 53.36,34.63 52.7,33.81 51.44,33.81 49.21,33.81 47.62,32.38 v46.99,32.38 | 12.06,35.23 11.75,34.92 | 12.09,34.59 11.75,34.92 | 11.75,34.92 8.57,34.92 8.23,34.59 | 6.03,35.24 5.71,34.92 | 5.71,34.92 6.03,34.61 | 5.71,34.92 5.71,32.07 6.67,31.11 6.67,25.08 8.99,22.76 | 40.94,10.77 41.2,11.03 41.27,11.11 41.27,13.97
BAT-I
  Top 0.254: C28.1 40.22,48.26 R13.2 41.06,46.15 41.06,44.87
  Top 0.406: 41.06,44.87 BD1.19
BAT-V
  Top 0.406: 43.18,39.37 41.91,38.1 R11.1 40.64,37.68 R10.1 | 43.18,39.37 BD1.18 | C27.1 43.6,38.95 43.18,39.37
D8
  Bottom 0.254: RA1.8 28.64,7.55 29.21,6.99 29.21,5.08 BD1.53
D9
  Bottom 0.254: RA1.7 29.45,8.02 30.48,6.99 BD1.54
D10
  Bottom 0.254: RA1.6 30.25,8.49 31.75,6.99 31.75,5.08 BD1.55
D11
  Bottom 0.254: RA1.5 31.05,8.96 33.02,6.99 BD1.56
D12
  Bottom 0.254: RA2.8 33.09,8.19 34.29,6.99 34.29,5.08 BD1.57
D13
  Bottom 0.254: RA2.7 33.89,8.02 BD1.58
D14
  Bottom 0.254: RA2.6 34.69,7.86 34.92,7.62 36.2,7.62 36.83,6.99 36.83,5.08 BD1.59
D15
  Bottom 0.254: RA2.5 35.49,8.96 BD1.60
DISTANCE-1
  Top 0.254: BD1.12 R14.2 52.91,38.95 C29.1
DISTANCE-2  (via drill 0.6)
  Top 0.254: BD1.13 48.26,46.35 49.21,47.31 59.37,47.31 v59.69,47.62
  Bottom 0.254: R15.2 v59.69,47.62 58,47.62 C30.1
DISTANCE-3
  Bottom 0.254: R16.2 BD1.14 50.59,39.59 C31.1
DISTANCE-4
  Top 0.254: R17.2 48.68,48.58 C32.1 48.05,48.68 45.72,46.35 BD1.15
DISTANCE-5
  Top 0.254: C33.1 R20.2 33.02,49.53 34.29,50.8 39.37,50.8 40.64,49.53 43.81,49.53 44.45,48.9 44.45,43.18 BD1.16
DISTANCE-6  (via drill 0.6)
  Top 0.254: v42.55,47.62 42.55,45.09 BD1.17
  Bottom 0.254: R21.2 42.55,50.16 42.44,50.06 C34.1 42.44,47.73 v42.55,47.62
GND  (via drill 0.6)
  Top 0.254: 31.44,32.39 31.43,32.38 31.43,31.11 29.84,29.53 29.21,29.53 28.57,28.89 27.94,28.89 v27.62,28.57 | C5.2 C2.2 18.73,22.86 18.89,23.02
  Top 0.61: IC12.2 24.77,49.21
  Top 0.813: IC16.7 31.44,32.39
  Bottom 0.254: IC5.8 43.53,16.23 43.81,16.51 | IC3.8 60.68,16.86 60.96,17.14 | IC2.8 61.31,32.03 61.59,31.75 | IC4.1 7.3,32.06 | IC3.1 56.13,16.89 55.88,17.14 | IC5.11 44.84,10.73 44.61,10.95 44.29,10.95 44.13,10.79 44.13,9.89 IC5.12
  other vias: 4.76,68.9 0.95,65.09 0.95,62.55 5.71,66.04 13.02,68.9 18.1,68.9 11.43,66.99 7.94,64.45 5.71,61.59 0.95,58.74 10.79,59.05 4.76,55.24 8.89,55.24 16.51,56.52 16.51,53.66 13.34,53.98 1.91,51.44 6.35,51.44 10.79,51.28 14.92,61.59 19.37,61.91 10.79,61.59 6.35,59.05 20.32,67.31 24.77,61.59 26.04,65.88 33.02,66.36 38.1,66.36 48.26,66.36 53.34,66.36 58.1,68.9 65.09,68.9 68.58,64.77 66.04,63.82 60.33,62.23 48.9,61.28 40.01,61.28 31.75,61.28 23.5,57.47 26.67,54.93 31.75,54.93 36.83,54.93 41.91,54.93 29.21,57.47 34.29,57.47 40.64,57.47 43.5,58.1 46.99,54.93 52.07,54.93 50.16,59.37 56.83,59.05 58.74,52.39 59.69,59.69 17.46,47.94 20.16,47.31 8.89,47.62 1.27,41.59 3.81,41.59 16.51,37.78 19.37,38.89 28.89,51.12 29.84,47.94 34.29,46.67 36.83,51.75 44.45,51.75 45.4,47.94 47.31,46.67 49.85,50.16 57.78,50.16 68.9,58.1 66.99,50.16 63.82,50.16 65.41,41.59 64.77,35.24 59.69,37.78 58.42,40.01 55.24,40.32 49.53,37.15 46.99,40.64 41.91,40.64 38.42,40.32 33.02,38.1 30.48,37.15 27.94,39.05 4.45,35.56 0.95,35.56 0.95,32.7 0.95,22.54 5.71,24.13 3.81,15.24 0.95,11.43 6.99,18.41 10.48,9.84 6.03,7.94 1.27,5.08 5.08,1.27 11.75,2.86 7.3,13.02 21.91,17.14 24.45,10.16 19.05,1.27 30.8,1.27 26.67,7.62 46.99,2.54 57.15,2.54 65.09,1.27 66.67,5.08 62.87,12.7 59.69,7.62 53.66,11.11 46.35,9.53 51.12,13.65 43.5,11.43 46.99,18.41 42.23,20.64 46.35,24.77 48.9,25.72 52.7,19.68 53.34,26.35 56.52,31.43 56.52,19.37 64.45,15.88 66.04,18.41 68.58,25.4 60.64,20 60.33,25.72 61.28,28.57 68.9,35.88 48.26,34.92 42.23,27.62 52.07,37.78 7.94,28.89 46.35,12.7 30.48,39.69 19.37,36.51 66.36,8.89 39.05,19.05 33.34,15.4 18.41,24.45 62.23,31.27
  pour Bottom (isolate 0.254): 0,70.17 0,-0.32 70.17,-0.32 70.17,70.17
  pour Top (isolate 0.254): 0,70.17 0,-0.32 70.17,-0.32 70.17,70.17
MOTER-PWM-N-1
  Bottom 0.254: IC7.2 29.88,19.02 30.48,18.41 30.48,16.83 29.84,16.19 29.84,15.24 29.53,14.92 23.81,14.92 19.32,10.43 IC1.19
MOTER-PWM-N-2  (via drill 0.6)
  Top 0.254: v32.7,18.73 33.02,19.05 33.02,21.91 v32.7,22.23 | v37.47,26.04 40.64,29.21 46.35,29.21 48.9,26.67 51.44,26.67 52.07,27.3 v52.07,34.92
  Bottom 0.254: IC7.4 29.53,20.32 31.11,18.73 v32.7,18.73 | v32.7,22.23 32.7,22.54 33.66,23.5 34.92,23.5 v37.47,26.04 | IC2.19 53.08,35.93 v52.07,34.92
MOTER-PWM-N-3
  Bottom 0.254: IC3.19 56.78,12.12 56.2,12.7 56.2,13.97 50.48,19.68 39.69,19.68 38.73,20.64 38.73,24.13 38.1,24.77 37.47,24.77 34.97,22.27 IC7.8
MOTER-PWM-N-4
  Bottom 0.254: IC7.6 27.91,21.62 26.67,22.86 26.67,29.21 23.18,32.7 22.86,33.02 22.59,33.28 IC4.19
MOTER-PWM-N-5
  Bottom 0.254: IC7.10 37.45,20.97 38.1,20.32 38.1,19.05 36.83,17.78 36.83,10.16 38.73,8.26 39.37,8.26 39.63,8.52 IC5.19
MOTER-PWM-N-6  (via drill 0.6)
  Top 0.254: v36.2,19.37 36.2,21.59 35.56,22.23 35.56,32.07 v36.2,32.7
  Bottom 0.254: IC7.12 35.58,19.67 v36.2,19.37 | IC6.19 45.45,33.71 44.77,33.02 36.83,33.02 36.51,32.7 v36.2,32.7
MOTER-PWM-P-1  (via drill 0.6)
  Top 0.254: BD1.27 31.75,43.18 31.75,36.83 25.4,30.48 v25.4,29.21
  Bottom 0.254: v25.4,29.21 21.59,25.4 21.59,24.13 27.35,18.37 IC7.1 28.89,17.46 27.94,16.51 24.13,16.51 20.32,12.7 20.32,12.38 19.01,11.07 IC1.18
MOTER-PWM-P-2  (via drill 0.6)
  Top 0.254: BD1.29 29.21,43.18 29.21,35.56 24.13,30.48 24.13,29.21 v25.4,27.94
  Bottom 0.254: v25.4,27.94 22.86,25.4 22.86,24.13 27.32,19.67 IC7.3 | IC2.18 56.87,35.28 57.47,35.88 57.47,40.96 57.15,41.27 57.15,42.55 56.52,43.18 29.21,43.18 BD1.29
MOTER-PWM-P-3  (via drill 0.6)
  Top 0.254: BD1.31 26.67,43.18 26.67,34.29 22.86,30.48 22.86,29.21 25.4,26.67 26.99,26.67 28.26,27.94 28.89,27.94 29.53,28.57 v29.84,28.57 | v37.47,23.5 37.47,22.86 38.1,22.23 38.1,18.73 40.01,16.83 54.93,16.83 55.88,15.88 55.88,13.97 56.52,13.34 v57.15,13.34
  Bottom 0.254: v29.84,28.57 31.11,27.3 31.11,24.77 31.75,24.13 31.75,21.59 32.38,20.95 33.02,20.95 33.62,21.56 33.62,21.62 IC7.9 35.59,21.62 v37.47,23.5 | IC3.18 57.43,13.05 v57.15,13.34
MOTER-PWM-P-4  (via drill 0.6)
  Top 0.254: BD1.33 24.13,43.18 v24.13,33.02 21.59,30.48 21.59,29.21 25.08,25.72 v25.4,25.72
  Bottom 0.254: v25.4,25.72 25.4,22.86 27.29,20.97 IC7.5 | IC4.18 23.21,33.94 v24.13,33.02
MOTER-PWM-P-5  (via drill 0.6)
  Top 0.254: BD1.34 22.86,33.02 20.32,30.48 20.32,29.21 24.77,24.77 26.67,24.77 27.3,25.4 27.3,26.04 28.57,27.3 v29.84,27.3
  Bottom 0.254: v29.84,27.3 30.48,26.67 30.48,24.13 31.11,23.5 31.11,20.95 31.75,20.32 IC7.11 36.83,20.32 37.47,19.68 37.47,19.37 36.2,18.1 36.2,9.53 38.1,7.62 40.01,7.62 40.28,7.9 IC5.18
MOTER-PWM-P-6  (via drill 0.6)
  Top 0.254: BD1.35 21.59,43.18 21.59,33.02 19.05,30.48 19.05,29.21 24.13,24.13 27.3,24.13 27.94,24.77 27.94,25.4 v28.57,26.04
  Bottom 0.254: v28.57,26.04 29.21,26.04 | 29.21,26.04 29.84,25.4 29.84,23.5 30.48,22.86 30.48,20.32 31.11,19.68 33.02,19.68 33.69,19.02 IC7.13 | 29.21,26.04 28.57,26.67 28.57,28.57 34.29,34.29 34.92,34.29 35.56,33.66 44.45,33.66 44.8,34.01 IC6.18
N$1
  Bottom 0.406: IC1.7 11.13,13.68 | IC1.6 10.48,13.03
  Bottom 0.61: L1.1 8.39,10.93 10.16,12.7 10.48,13.03 11.13,13.68
N$2  (via drill 0.6)
  Top 0.406: 16.51,2.54 16.51,10.16
  Top 0.61: M1.- 15.61,1.64 16.51,2.54 | 16.51,10.16 v19.68,13.34
  Bottom 0.406: IC1.15 18.74,13.03 19.38,13.03 | IC1.14 19.34,13.68
  Bottom 0.61: 19.34,13.68 v19.68,13.34 19.38,13.03
N$3
  Bottom 0.406: IC2.7 63.8,32.68 | IC2.6 64.44,33.33
  Bottom 0.61: 63.8,32.68 64.44,33.33 66.04,34.92 68.58,37.47 68.58,50.16 66.64,52.11 L2.1
N$4
  Bottom 0.254: 56.19,33.33 56.2,33.34
  Bottom 0.406: IC2.14 55.54,32.68 56.19,33.33 IC2.15
  Bottom 0.61: M2.- 66.3,61.86 64.14,59.69 64.14,51.44 66.67,48.9 66.67,41.27 65.41,40.01 60.33,40.01 58.42,38.1 58.42,35.56 57.78,34.92 57.78,33.66 57.15,33.02 56.5,33.02 56.19,33.33
N$5
  Bottom 0.406: IC3.7 60.03,17.48 59.38,16.84 IC3.6
  Bottom 0.61: 60.03,17.48 60.96,18.41 63.54,21 L3.1
N$6
  Bottom 0.406: IC3.15 59.38,11.12 60.03,11.77 IC3.14
  Bottom 0.61: M3.- 67.94,14.61 62.87,14.61 60.03,11.77
N$7  (via drill 0.6)
  Top 0.61: L4.1 19.01,65.13 22.23,61.91 22.23,55.88 19.68,53.34 19.68,50.16 18.73,49.21 14.92,49.21 12.7,46.99 12.54,46.83 12.06,46.35 12.06,44.45 11.43,43.81 9.21,43.81 8.57,43.18 8.57,41.59 9.53,40.64 v9.53,37.15
  Bottom 0.254: 9.23,36.53 9.31,36.7 v9.53,37.15 | 8.58,35.88 8.58,36.03 8.57,36.04 8.65,36.04
  Bottom 0.406: IC4.7 9.23,36.53 | IC4.6 8.58,35.88
  Bottom 0.61: 8.65,36.04 9.31,36.7
N$8
  Bottom 0.254: M4.- 7.99,66.3
  Bottom 0.406: IC4.14 11.72,36.53 12.38,35.88 IC4.15
  Bottom 0.61: 7.99,66.3 12.06,62.23 12.06,42.55 10.79,41.27 10.79,37.47 11.72,36.53
N$9
  Bottom 0.254: 42.88,13.68 42.86,13.65
  Bottom 0.406: IC5.6 42.23,14.28 | IC5.7 42.88,13.68
  Bottom 0.61: 42.23,14.28 42.86,13.65 43.18,13.34 45.4,11.11 46.99,11.11 48.3,12.42 L5.1
N$10
  Bottom 0.406: IC5.15 42.23,9.2 42.88,8.55 IC5.14 | 49.53,3.17 49.53,6.99
  Bottom 0.61: M5.- 50.8,1.91 49.53,3.17 | 49.53,6.99 48.26,8.26 43.18,8.26 42.88,8.55
N$11
  Bottom 0.406: IC6.6 42.85,28.9 42.2,29.55 IC6.7
  Bottom 0.61: 42.85,28.9 43.18,28.57 46.99,28.57 47.62,27.94 47.62,23.45 L6.1
N$12  (via drill 0.6)
  Top 0.61: M6.- 48.26,33.02 45.72,35.72 43.81,35.72 42.55,36.83 v42.55,37.47
  Bottom 0.406: IC6.14 42.2,37.12 v42.55,37.47 42.85,37.16 IC6.15
N$13
  Bottom 0.61: L1.2 11.68,7.12 M1.+
N$14
  Top 0.406: IC14.3 14.92,19.37 16.51,17.78 C1.1
N$15
  Top 0.406: IC14.5 13.97,24.13 13.12,24.98 R1.1 13.12,26.67 | C3.2 13.12,26.67 | R2.2 12.48,27.3 13.12,26.67
N$16
  Top 0.406: IC21.3 3.81,20.57 D1.1 4.03,17.57
  Top 1.27: 4.03,17.57 6.35,15.24 R7.1
N$17
  Bottom 0.254: 13.55,26.7 IC15.3
  Bottom 0.406: C4.1 13.55,26.7
N$18
  Bottom 0.406: R3.1 13.12,22.44 12.7,22.86 IC15.5 | R3.1 C6.2 | R4.2 11.01,19.48 R3.1
N$19  (via drill 0.6)
  Top 0.254: IC19.19 21.86,23.86 19.05,26.67 v17.78,26.67 | 5.08,43.18 7.62,44.77 IC17.3 7.62,46.99 6.99,47.94 1.59,47.94 0.95,48.58 0.95,55.56 IC18.5 | v16.19,36.2 17.14,35.24 v17.3,30.48 16.35,30.48 14.61,28.89 10.16,28.89 6.35,32.7 6.35,39.37 5.08,40.96 5.08,43.18 | 5.08,43.18 R5.1
  Bottom 0.254: IC16.8 29.65,33.22 27.3,35.56 16.83,35.56 v16.19,36.2 | v17.78,26.67 17.78,26.99 17.46,27.3 17.46,30.16 v17.3,30.48
N$20  (via drill 0.6)
  Top 0.254: IC19.18 22.5,24.48 19.05,27.94 v18.41,27.94 | v6.99,40.64 6.99,33.02 10.48,29.53 14.29,29.53 16.35,31.43 v16.35,32.38 16.35,34.61 16.19,34.77 v16.19,34.92
  Bottom 0.254: v18.41,27.94 18.41,30.64 16.51,32.38 v16.35,32.38 | IC18.6 3.17,55.24 1.27,55.24 0.95,54.93 0.95,47.62 1.27,47.31 4.13,47.31 5.08,46.35 IC17.2 6.99,43.81 6.99,43.08 R6.1 6.99,42.65 v6.99,40.64 | IC16.9 27.85,31.2 24.13,34.92 v16.19,34.92
N$21
  Top 0.406: IC21.4 8.15,20.64 R8.1
N$22  (via drill 1)
  Top 0.406: 3.7,12.7 F1.2 | F1.2 2.65,12.81 2.54,12.7 | D1.2 F1.2
  Top 1.27: v1.27,15.24 1.27,13.97 2.54,12.7 3.7,12.7
  Bottom 0.406: F1.2 3.7,12.81
  Bottom 1.27: 3.7,12.81 v1.27,15.24
N$23
  Bottom 1.27: B1.+ 3.81,33.02 SW1.1 SW1.2
N$24
  Bottom 0.254: IC23.3 27.94,52.17 R18.2
N$25
  Bottom 0.61: L2.2 66.04,57.89 M2.+
N$26
  Bottom 0.254: L3.2 68.54,23.45
  Bottom 0.61: 68.54,23.45 67.94,22.86 67.94,17.78 68.21,17.52 M3.+
N$27
  Top 0.61: M4.+ 11.84,68.21 L4.2
N$28
  Bottom 0.254: IC23.27 25.4,66.8 SJ3.2
N$29
  Bottom 0.254: IC23.26 27.94,65.85 SJ2.2
N$30
  Bottom 0.254: IC23.13 SJ1.2
N$31
  Bottom 0.254: IC23.20 SJ4.2
N$32  (via drill 0.6)
  Top 0.254: IC21.1 2.86,22.54 1.27,24.13 1.27,31.11 2.54,32.38 3.81,32.38 5.4,33.66 v5.4,38.1 | R13.1 37.25,46.99 36.62,47.62 v32.38,47.62 31.11,46.35 19.05,46.35 18.41,45.72 14.61,45.72 13.97,45.09 13.97,42.55 13.65,42.23 v9.84,42.23
  Bottom 0.254: v5.4,38.1 5.4,39.05 5.71,39.37 7.62,39.37 8.89,40.64 8.89,41.27 v9.84,42.23 | R9.2 33.44,48.68 v32.38,47.62
N$33
  Bottom 0.254: IC23.10 45.72,55.46 R19.2
N$34
  Bottom 0.254: IC9.1 60.43,64.03 62.87,61.59 62.87,47.84 R15.1
N$35
  Bottom 0.406: 52.07,2.86 52.07,12.11
  Bottom 0.61: 52.07,12.11 L5.2 | 52.07,2.86 M5.+
N$36  (via drill 0.6)
  Top 0.254: IC8.1 6.46,9.42 11.43,4.45 v12.06,4.45 | v26.67,5.08 33.66,5.08 34.29,4.45 34.29,3.17 35.56,1.91 43.18,1.91 44.45,3.17 44.45,12.7 47.31,15.56 v47.31,15.88 | v48.9,18.41 53.34,18.41 54.61,19.68 54.61,34.92 52.7,36.83 51.22,36.83 R14.1
  Bottom 0.254: v12.06,4.45 12.7,4.45 13.34,5.08 v26.67,5.08 | v47.31,15.88 47.31,16.51 v48.9,18.41
N$37  (via drill 0.6)
  Top 0.254: IC10.1 67.31,11.43 66.04,12.7 66.04,15.88 61.59,20.32 61.59,26.04 v60.33,27.3 | v53.34,27.94 53.34,34.92 52.39,35.88 v50.16,35.88
  Bottom 0.254: v60.33,27.3 59.69,27.3 59.05,27.94 v53.34,27.94 | R16.1 48.26,36.2 v50.16,35.88
N$38
  Bottom 0.61: L6.2 51.44,22.86 50.16,24.13 M6.+
N$39
  Bottom 1.27: SW1.3 F1.1
N$44
  Top 0.254: R20.1 28.57,49.53 IC12.1
N$45  (via drill 0.6)
  Top 0.254: R17.1 57.78,48.58 59.69,50.48 59.69,57.78 57.15,60.33 24.13,60.33 v23.5,60.96 | v14.61,63.5 6.13,63.5 IC11.1
  Bottom 0.254: v23.5,60.96 17.14,60.96 v14.61,63.5
N$46
  Bottom 0.254: IC13.1 13.97,59.05 15.24,60.33 22.23,60.33 23.5,59.05 48.26,59.05 50.16,60.96 60.96,60.96 61.59,60.33 61.59,53.34 59.69,51.44 47.84,51.44 R21.1
N$47  (via drill 0.6)
  Top 0.254: IC19.1 21.2,12.45 22.23,11.43 26.67,11.43 v26.67,11.11
  Bottom 0.254: RA1.1 27.67,11.16 v26.67,11.11
N$48  (via drill 0.6)
  Top 0.254: IC19.2 21.86,13.07 22.23,12.7 26.67,12.7 v27.3,12.06
  Bottom 0.254: RA1.2 29.45,11.67 29.21,12.06 v27.3,12.06
N$49  (via drill 0.6)
  Top 0.254: IC19.3 22.5,13.69 22.86,13.34 27.62,13.34 v27.94,13.02
  Bottom 0.254: RA1.3 30.25,11.66 29.53,12.54 29.21,12.54 29.05,12.7 28.26,12.7 v27.94,13.02
N$50  (via drill 0.6)
  Top 0.254: IC19.4 23.16,14.31 23.29,14.11 | 23.29,14.11 23.5,13.81 | v28.89,13.65 28.73,13.81 28.26,13.81 28.1,13.97 27.78,13.97 27.62,13.81 23.59,13.81 23.29,14.11
  Bottom 0.254: 29.21,13.34 v28.89,13.65 29.53,13.02 29.84,13.02 31.05,11.82 RA1.4
N$51  (via drill 0.6)
  Top 0.254: IC19.5 23.8,17.45 24.77,18.41 26.99,18.41 27.94,19.37 29.53,19.37 v31.75,17.14
  Bottom 0.254: v31.75,17.14 30.48,15.88 30.48,13.34 32.66,11.16 RA2.1
N$52  (via drill 0.6)
  Top 0.254: IC19.6 24.45,17.14 25.08,17.78 27.3,17.78 28.26,18.73 28.89,18.73 v31.75,15.88
  Bottom 0.254: v31.75,15.88 31.75,12.7 32.38,12.06 33.5,12.06 33.57,11.99 33.89,11.99 RA2.2
N$53  (via drill 0.6)
  Top 0.254: IC19.7 25.11,16.8 25.08,16.83 25.4,17.14 27.62,17.14 28.26,17.78 28.57,17.78 31.91,14.45 v32.7,14.45
  Bottom 0.254: RA2.3 34.61,11.24 34.61,12.06 34.45,12.06 33.97,12.54 33.66,12.54 33.5,12.7 33.02,12.7 32.7,13.02 v32.7,14.45
N$54  (via drill 0.6)
  Top 0.254: IC19.8 25.75,16.23 26.04,16.51 27.94,16.51 28.26,16.83 31.59,13.49 34.13,13.49 v34.29,13.34
  Bottom 0.254: v34.29,13.34 34.29,13.02 35.56,12.06 35.56,11.23 RA2.4
N$55
  Top 0.254: IC19.15 24.45,23.18 24.77,23.5 27.94,23.5 28.57,24.13 28.57,24.77 29.77,25.96 RA3.1
N$56
  Top 0.254: IC19.14 25.11,22.57 25.4,22.86 28.57,22.86 29.21,23.5 29.21,24.13 30.25,25.16 RA3.2
N$57
  Top 0.254: IC19.13 25.75,21.95 26.04,22.23 29.21,22.23 29.84,22.86 29.84,23.5 30.71,24.36 RA3.3
N$58
  Top 0.254: RA3.4 31.39,23.13 30,21.75 26.83,21.75 26.41,21.32 IC19.12
N$59  (via drill 0.6)
  Top 0.254: IC19.11 27.05,19.43 26.67,19.05 v24.13,19.05
  Bottom 0.254: v24.13,19.05 24.13,19.68 23.5,20.32 R22.1
PWM-STBY  (via drill 0.5, 0.6)
  Top 0.254: BD1.36 20.32,41.27 | 20.32,41.27 20.32,33.02 18.26,30.8 18.26,29.37 17.46,28.57 17.46,27.94 16.83,27.3 16.83,26.35 17.78,25.4 19.05,25.4 20.32,24.13 20.32,22.23 19.37,21.27 18.41,21.27 17.46,20.32 17.46,16.83 15.88,15.24 14.61,15.24 13.97,14.61 13.97,10.95 v14.13,10.79 | v39.05,34.61 v39.05,32.07 | 20.32,41.27 19.68,40.64 12.06,40.64 10.79,39.37 10.79,34.61 v9.84,33.66 | v39.05,32.07 37.15,32.07 36.2,31.11 36.2,22.86 37.47,21.59 37.47,16.19 37.78,15.88 38.1,15.88 v40.16,13.81 | v47.94,31.43 47.94,31.11 46.99,30.16 40.96,30.16 v39.05,32.07
  Bottom 0.254: IC1.3 13.69,11.07 v14.13,10.79 | BD1.36 20.32,41.27 20.95,40.64 | 20.95,40.64 36.2,40.64 39.05,37.78 v39.05,34.61 | IC6.3 44.8,31.39 43.81,32.38 40.32,32.38 40.01,32.07 v39.05,32.07 | 52.07,30.48 52.07,32.38 51.44,33.02 49.53,33.02 v47.94,31.43 47.91,31.39 | 52.07,30.48 53.34,29.21 57.78,29.21 59.05,30.48 59.05,34.92 59.41,35.28 IC2.3 | IC4.3 9.24,33.94 v9.84,33.66 | IC5.3 40.28,13.69 v40.16,13.81 | IC3.3 57.43,16.86 53.34,20.95 53.34,23.5 52.07,24.77 52.07,30.48 | 20.95,40.64 20.95,39.79 R12.2
ZIGBEE-RX
  Bottom 0.254: BD1.39 15.24,48.9 18.1,51.75 19.05,51.75 19.68,51.12 R18.1
ZIGBEE-TX
  Bottom 0.254: R19.1 42.97,56.73 41.27,58.42 21.27,58.42 19.37,56.52 18.1,56.52 17.46,55.88 17.46,52.7 14.61,49.85 14.61,45.72 13.97,45.09 13.97,42.86 14.92,41.91 BD1.40